# Altium PCB Teensy Crash EDR v3 for Bud PN-1331 PCB Board.PcbDoc
Units mil, origin at the board's own origin, x right, y up, seen from the top; angles counter-clockwise.
Board outline 2700 x 2800 mil, 2 copper layers (Top Layer, Bottom Layer); 30 components, 40 nets, 174 pads, 19 vias.
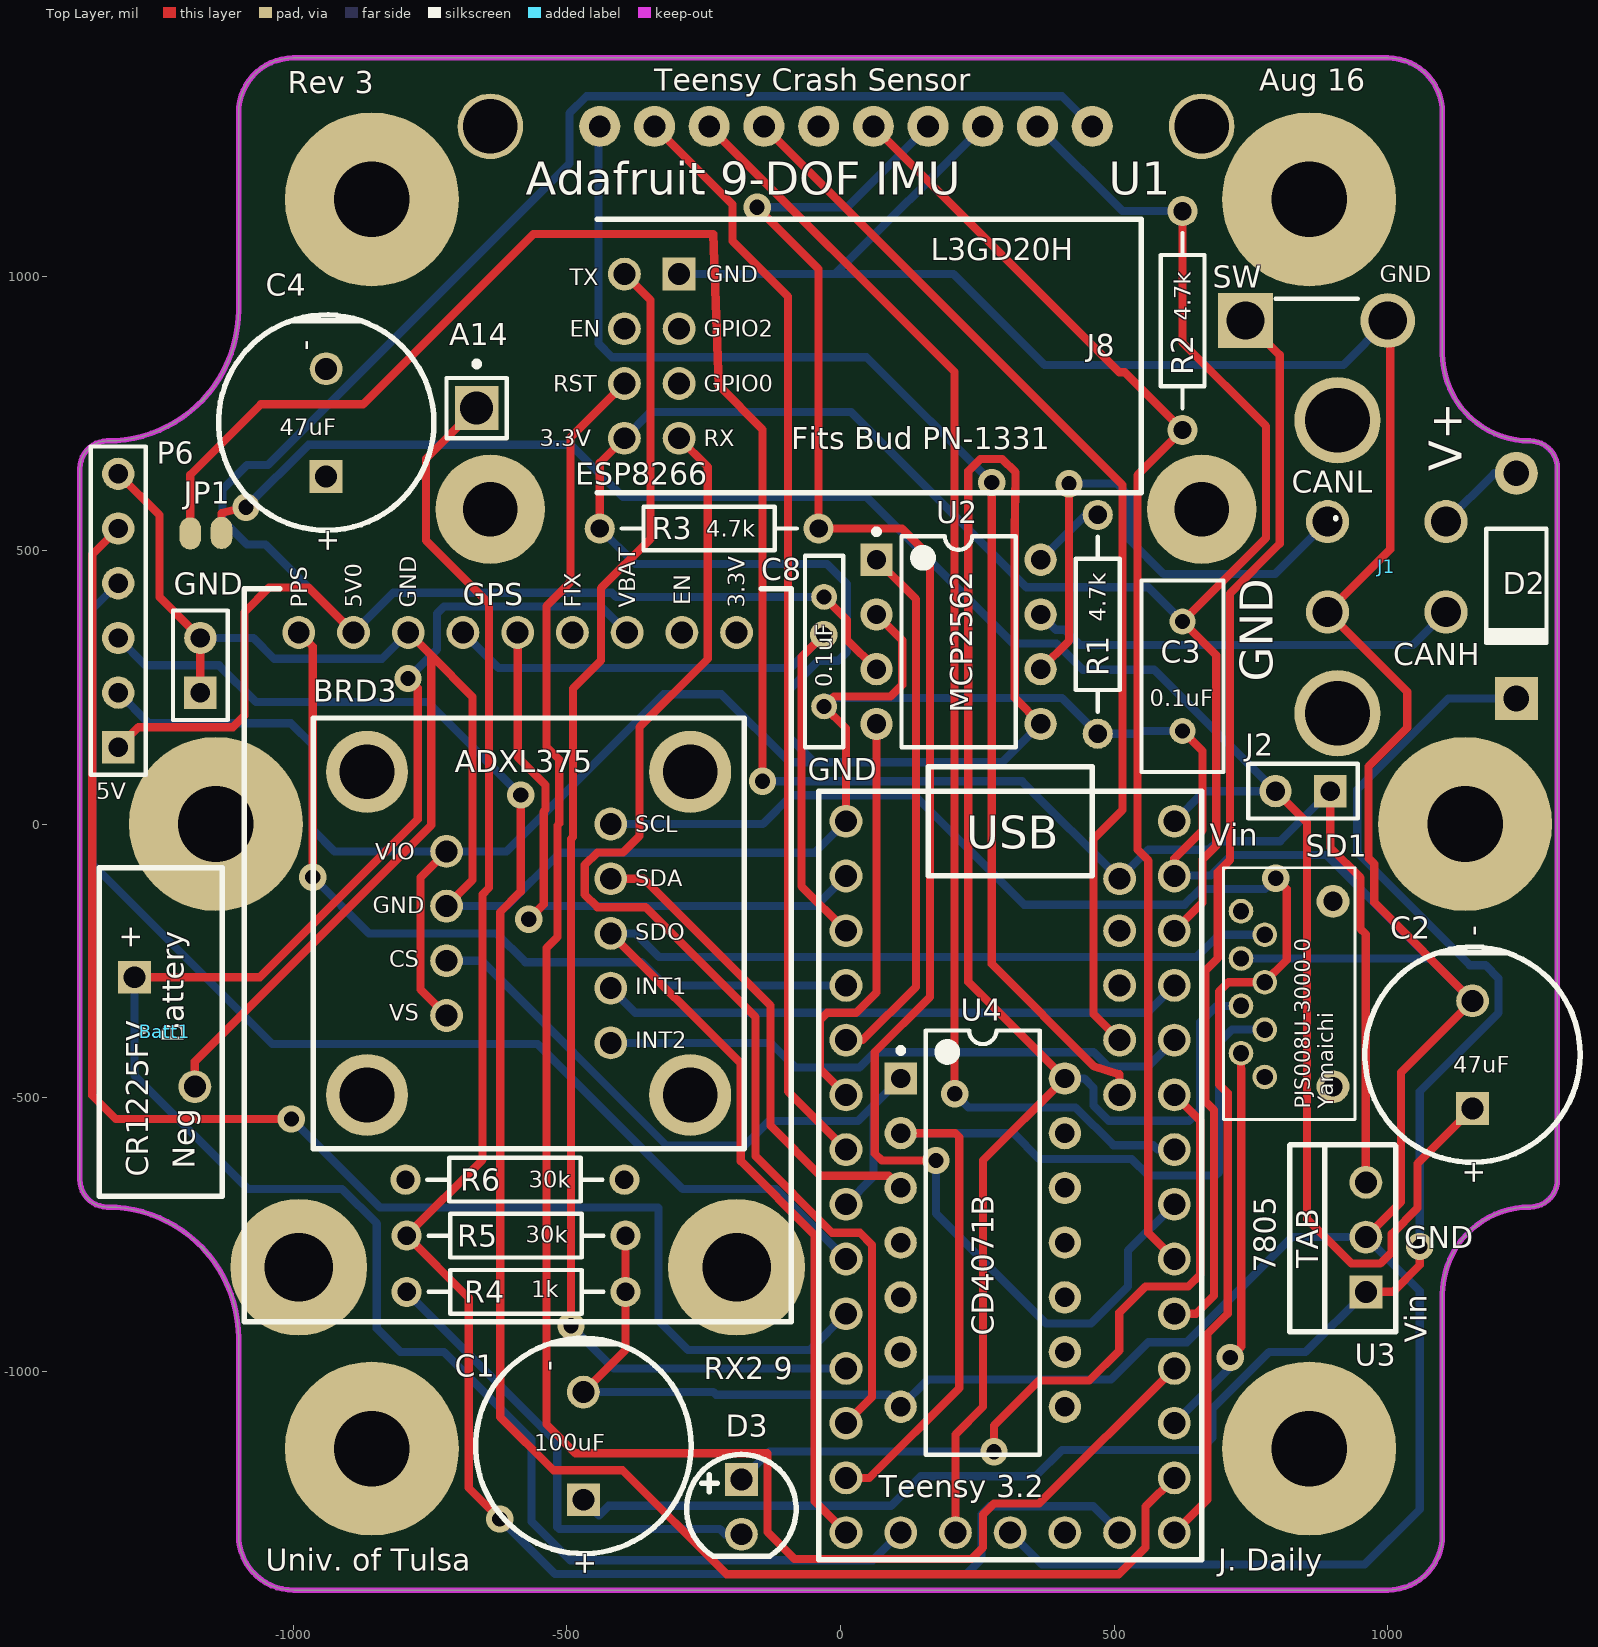
[diagram p0: Top Layer view]
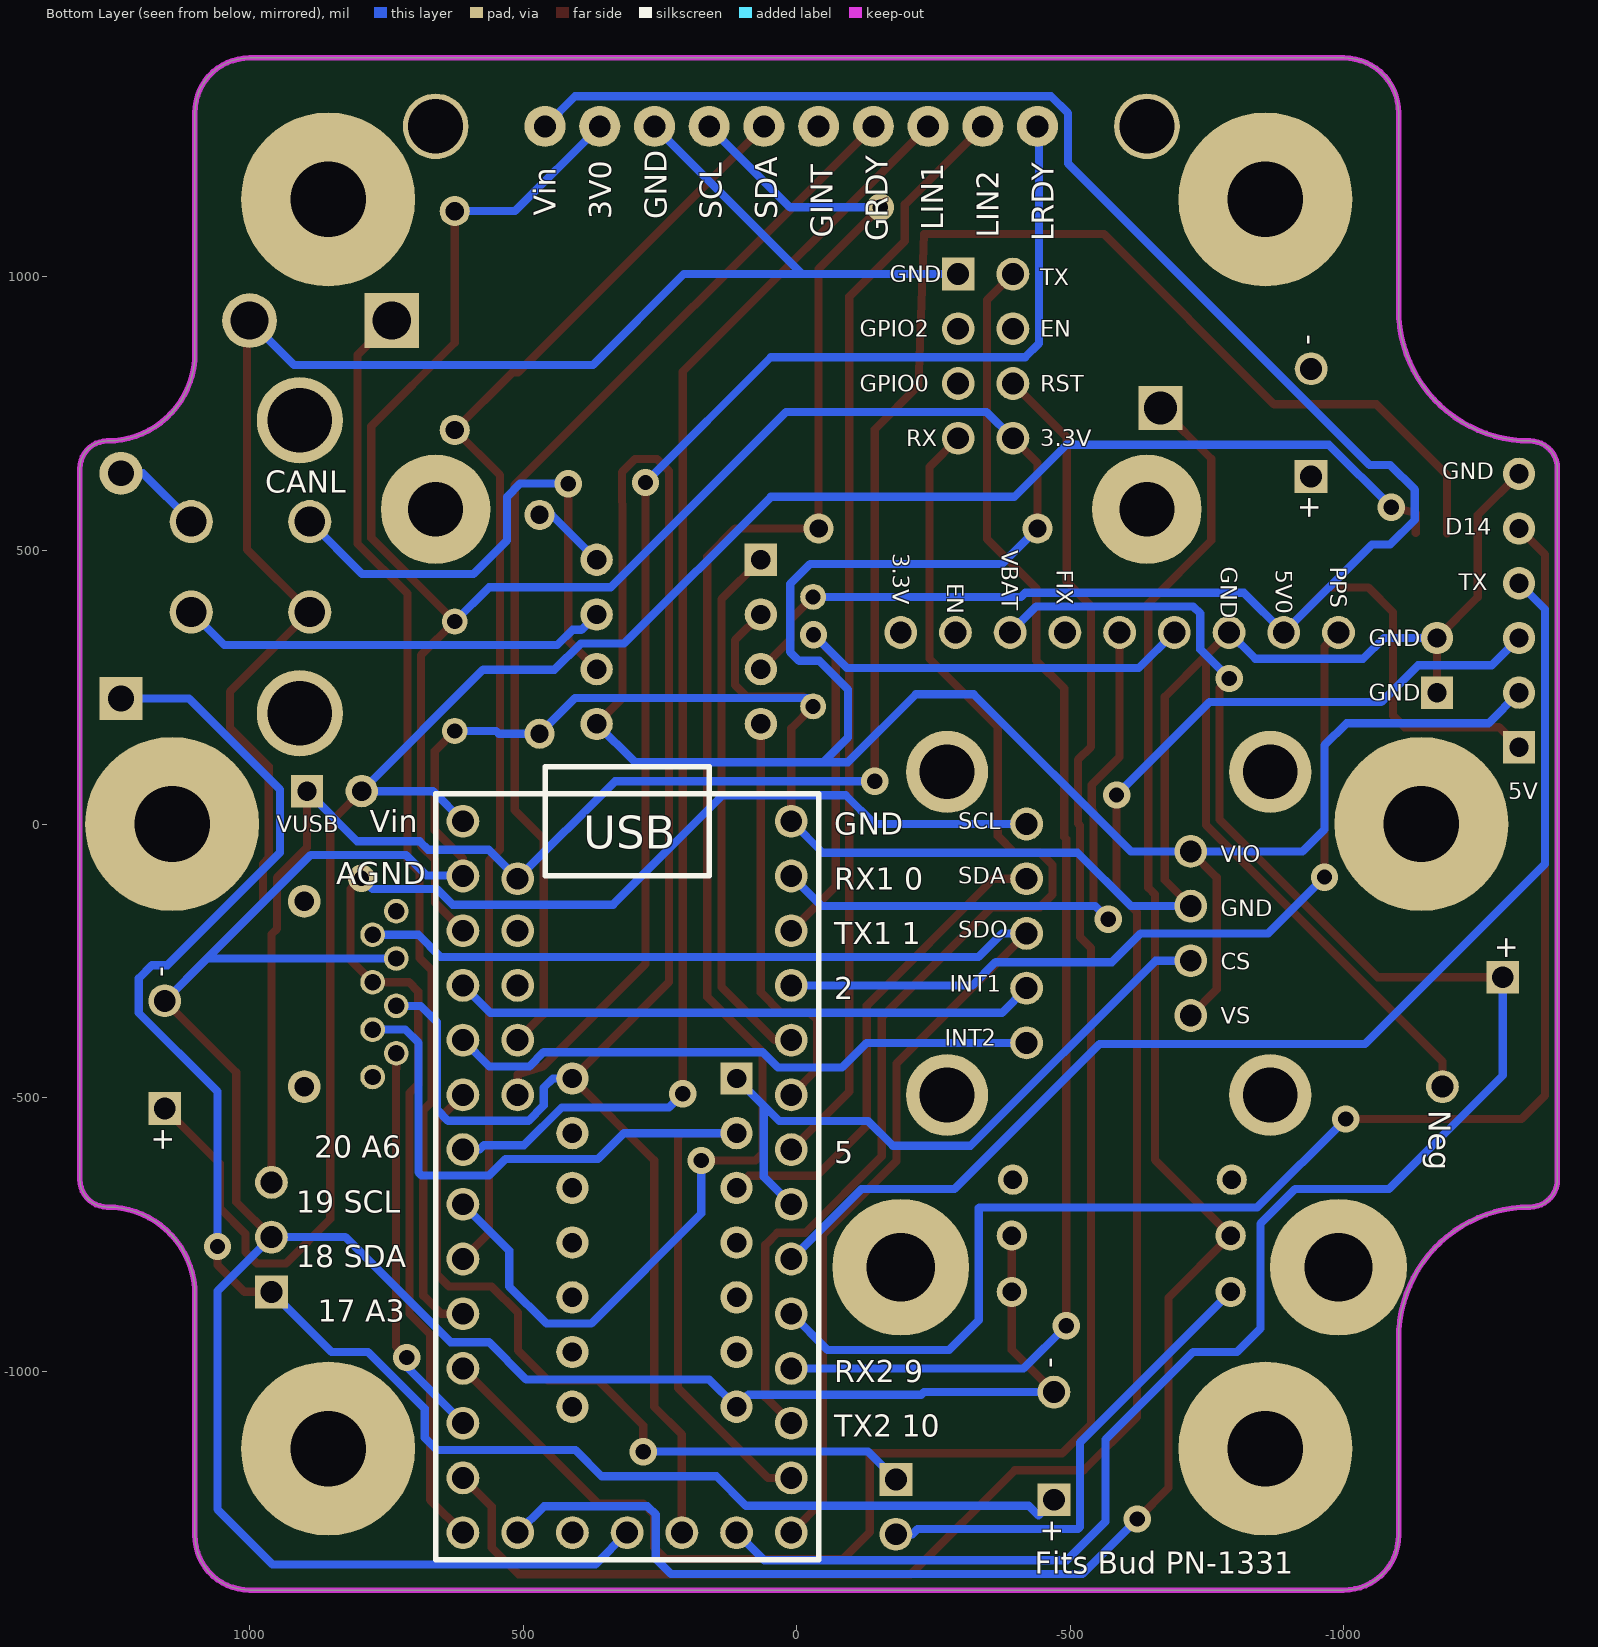
[diagram p1: Bottom Layer view, seen from below]

## Layer stack, top to bottom
Top Solder: solder mask 0.4, Solder Resist, Dk 3.5
Top Layer: signal copper 1.4
Dielectric 1: dielectric 12.6, FR-4, Dk 4.8
Bottom Layer: signal copper 1.4
Bottom Solder: solder mask 0.4, Solder Resist, Dk 3.5

## Board outline
-1340,-700 cw(c-1340,-650) -1390,-650 -1390,650 cw(c-1340,650) -1340,700 ccw(c-1340,940) -1100,940 -1100,1300 cw(c-1000,1300) -1000,1400 1000,1400 cw(c1000,1300) 1100,1300 1100,860 ccw(c1260,860) 1260,700 cw(c1260,650) 1310,650 1310,-650 cw(c1260,-650) 1260,-700 ccw(c1260,-860) 1100,-860 1100,-1300 cw(c1000,-1300) 1000,-1400 -998.89,-1400 -998.89,-1399.99 cw(c-1000,-1300) -1100,-1300 -1100,-940 ccw(c-1340,-940)

## Design rules (kind name [scope] priority, off if disabled: settings)
Clearance [All] p1: gap=10
PolygonConnect [All] p1: connectstyle=Relief reliefconductorwidth=10 reliefentries=4 polygonreliefangle="90 Angle" airgapwidth=10
RoutingVias [All] p1: holewidth=28 width=50 viastyle="Through Hole" minholewidth=28 minwidth=50 maxholewidth=28 maxwidth=50
SolderMaskExpansion [All] p1: expansion=4
Width [All] p1: maxlimit=30 minlimit=10 preferedwidth=15 minimp=50.000000 maximp=50.000000 favimp=50.000000
30 further rules are at their usual default settings.

## Components (designator, comment, footprint, x,y, rotation, side; value= is the part's Value field where it differs from the comment)
A14 "Socket" PIN1 -665,760 r0 top
Batt1 "CR1225FV-LF" "Coin Cell with Tabs" -1180,-480 r90 top
BRD3 "ADXL375" "ADXL375 EVAL" -570,-200 r0 top
C1 "100uF" "Elec. Cap 5 x 10mm" -470,-1235 r90 top
C2 "47uf" "Elec. Cap 5 x 10mm" 1155,-520 r90 top
C3 "0.1uF" RAD-0.2 625,270 r90 top
C4 "47uF" "Elec. Cap 5 x 10mm" -940,635 r90 top
C8 "0.1uF" RAD-0.2 -30,315 r90 top
D2 "STPS2150" DO-41 1235,435 r270 top
D3 "Red" "5mm Rad LED" -180,-1250 r0 top
GND "Header 2" HDR1X2#1 -1170,240 r90 top
GPS "Adafruit Ultimate GPS" GPS -190,430 r90 top
J1 "4 Pos Mini-Fit Jr." "4 POS Vertical MINI-FIT JR" 890,470 r90 top
J2 "Header 2" HDR1X2#1 895,60 r180 top
J8 "ESP8266" ESP8266 -395,1005 r0 top
JP1 "Solder Jumper" "Solder Jumper" -1150,530 r0 top
P6 "Header 6" HDR1X6 -1319.98,140 r90 top
R1 "4.7k" AXIAL-0.4 470,365 r90 top
R2 "4.7k" AXIAL-0.4 625,920 r90 top
R3 "4.7k" AXIAL-0.4 -240,540 r180 top
R4 "1.5k" AXIAL-0.4 -593,-855 r0 top
R5 "30k" AXIAL-0.4 -593,-752.25 r180 top
R6 "30k" AXIAL-0.4 -595,-650 r180 top
SD1 "microSD" "SD- VERTICAL" 900,-480 r90 top
SW "Header 2" HDR1X2#2 875,910 r0 top
"Teensy 3.2" "Teensy 3.2" Teensy 10,-1295 r0 top
U1 "9-DOF IMU BREAKOUT BRD" "Adafruit 9-DOF IMU" 660,1275 r180 top
U2 "MCP2562-E/P" PDIP300-P8 215.67,332.91 r0 top
U3 "OKI-78SR" 78xx 960,-855 r90 top
U4 "74HC32" N14A 260,-765 r0 top

## Footprints (in the part's own frame and the unit in brackets; to place one, negate y for a bottom-side part, rotate by r counter-clockwise, add the part's x,y. Pads: shape width x height; smd on the part's side, far side on the other; paste and mask are expansions set on the pad)
"4 POS Vertical MINI-FIT JR" [mm] "Vertical Header"
  round 4 hole 3: 0(-6.8,-0.46) 0(6.8,-0.46)
  round 2 hole 1.4: 1(2.1,-5.5) 2(-2.1,-5.5) 3(2.1,0) 4(-2.1,0)
"5mm Rad LED" [mil]
  rect 60x60 hole 40: 1(-1.11,52.06)
  round 60 hole 40: 2(-1.11,-47.94)
  silkscreen extent -101,-88 99,98
78xx [mil] "Voltage regulator based on LM7805"
  rect 60x60 hole 40: 1(0,0)
  round 60 hole 40: 2(100,0) 3(200,0)
  silkscreen extent -73,-55 269,139
"Adafruit 9-DOF IMU" [mil] "Adafruit 9-DOF IMU Breakout - L3GD20H + LSM303  PRODUCT ID: 1714"
  round 200 hole 100: 0(0,700) 0(1300,700)
  round 120 hole 100: 0(0,0) 0(1300,0)
  round 75 hole 40: 1(200,0) 2(300,0) 3(400,0) 4(500,0) 5(600,0) 6(700,0) 7(800,0) 8(900,0) 9(1000,0) 10(1100,0)
"ADXL375 EVAL" [mil] "EVAL-ADXL375Z Blard"
  round 150 hole 100: 0(-295.28,-295.28) 0(-295.28,295.28) 0(295.28,-295.28) 0(295.28,295.28)
  round 60 hole 40: 1(-150,-150) 2(-150,-50) 3(-150,50) 4(-150,150) 5(150,-200) 6(150,-100) 7(150,0) 8(150,100) 9(150,200)
  silkscreen extent -394,-394 394,394
AXIAL-0.4 [mm] "Axial Device, Thru-Hole; 2 Leads; 0.4 in Pin Spacing"
  round 1.4 hole 0.85: 1(-5.08,0) 2(5.08,0)
  silkscreen extent -4.06,-1.02 4.06,1.02
"Coin Cell with Tabs" [mil] "Renata Two pins vertical mounting"
  rect 60x60 hole 40: 1(200,110.24)
  round 60 hole 40: 2(0,0)
  silkscreen extent -200,-50 400,175
DO-41 [mm] "Diode, Axial; Body 5.2 x 2.7 mm (LxDia. max), Lead Dia. 0.86 mm (max)"
  round 2 hole 1.2: 1(-5.23,0)
  rect 2x2 hole 1.2: 2(5.23,0)
  silkscreen extent -2.65,-1.4 2.75,1.4
"Elec. Cap 5 x 10mm" [mil] "2 lead polarized Radial Capacitor with 5 mm lead spacing and 10 mm diameter can"
  rect 60x60 hole 40: 1(0,0)
  round 60 hole 40: 2(196.85,0)
  silkscreen extent -98,-197 295,197
ESP8266 [mil] "WiFi Module - ESP8266 Sparkfun"
  rect 60x60 hole 40: 1(100,0)
  round 60 hole 40: 2(0,0) 3(100,-100) 4(0,-100) 5(100,-200) 6(0,-200) 7(100,-300) 8(0,-300)
  silkscreen extent -50,-400 945,100
GPS [mil] "Adafruit Ultimate GPS Breakout"
  round 250 hole 125: 0(-1240,0) 0(-1240,800)
  round 60 hole 40: 1(-80,0) 2(-80,100) 3(-80,200) 4(-80,300) 5(-80,400) 6(-80,500) 7(-80,600) 8(-80,700) 9(-80,800)
  silkscreen extent -1340,-100 0,900
HDR1X2#1 [mm] "Connector; Header; 2 Position"
  rect 1.5x1.5 hole 0.9: 1(0,0)
  round 1.5 hole 0.9: 2(2.54,0)
  silkscreen extent -1.27,-1.27 3.81,1.27
HDR1X2#2 [mm] "Connector; Header; 2 Position"
  rect 2.54x2.54 hole 1.778: 1(-3.429,0.254)
  round 2.54 hole 1.778: 2(3.175,0.254)
  silkscreen extent -2.03,1.27 1.78,1.27
HDR1X6 [mm] "Connector; Header; 6 Position"
  rect 1.5x1.5 hole 0.9: 1(0,0)
  round 1.5 hole 0.9: 2(2.54,0) 3(5.08,0) 4(7.62,0) 5(10.16,0) 6(12.7,0)
  silkscreen extent -1.27,-1.27 13.97,1.27
N14A [mm] "DIP, 14-Leads, Row Spacing 7.62mm, Pitch 2.54mm, Body 19.18x6.35mm"
  rect 1.5x1.5 hole 0.9: 1(-3.81,7.62)
  round 1.5 hole 0.9: 2(-3.81,5.08) 3(-3.81,2.54) 4(-3.81,0) 5(-3.81,-2.54) 6(-3.81,-5.08) 7(-3.81,-7.62) 8(3.81,-7.62) 9(3.81,-5.08) 10(3.81,-2.54) 11(3.81,0) 12(3.81,2.54) 13(3.81,5.08) 14(3.81,7.62)
  silkscreen extent -3.93,-9.85 2.65,9.85, body extent -3.55,-9.85 3.55,9.85, height 5.08
PDIP300-P8 [mm] "DIP, 8-Leads, Row Spacing 7.62mm, Pitch 2.54mm, Body 9.5x6.6mm"
  rect 1.5x1.5 hole 0.9: 1(-3.81,3.81)
  round 1.5 hole 0.9: 2(-3.81,1.27) 3(-3.81,-1.27) 4(-3.81,-3.81) 5(3.81,-3.81) 6(3.81,-1.27) 7(3.81,1.27) 8(3.81,3.81)
  silkscreen extent -3.93,-4.9 2.65,5.23, body extent -3.55,-4.9 3.55,4.9, height 4.32
PIN1 [mil] "Connector; Plug"
  rect 80x80 hole 60: 1(0,0)
  silkscreen extent -55,-55 55,86
RAD-0.2 [mm] "Radial Cap, Thru-Hole; 2 Leads; 0.2 in Pin Spacing"
  round 1.2 hole 0.7: 1(-2.54,0) 2(2.54,0)
  silkscreen extent -4.44,-1.91 4.44,1.91
"SD- VERTICAL" [mil] "MicroSD Card Conn Ver Dip Mnt Manual Yamaichi PJS008U-3000-0"
  round 60 hole 35.43: 0(0,0) 0(338.58,0)
  round 45 hole 30: 1(17.72,124.8) 2(61.02,168.11) 3(104.33,124.8) 4(147.64,168.11) 5(190.94,124.8) 6(234.25,168.11) 7(277.56,124.8) 8(320.87,168.11)
  silkscreen extent -60,-40 400,200
"Solder Jumper" [mm]
  rrect100% 1x1.5 smd: 1(-0.974,0.025) 2(0.475,0.05)
Teensy [mil] "32 bit Arduino Compatible Microcontroller www.pjrc.com/teensy"
  round 60 hole 40: 1(0,0) 2(0,100) 3(0,200) 4(0,300) 5(0,400) 6(0,500) 7(0,600) 8(0,700) 9(0,800) 10(0,900) 11(0,1000) 12(0,1100) 13(0,1200) 14(0,1300) 15(100,0) 16(200,0) 17(300,0) 18(400,0) 19(500,0) 20(600,0) 21(600,100) 22(600,200) 23(600,300) 24(600,400) 25(600,500) 26(600,600) 27(600,700) 28(600,800) 29(600,900) 30(600,1000) 31(600,1100) 32(600,1200) 33(600,1300) 34(500,1195) 35(500,1000) 36(500,900) 37(500,800)
  silkscreen extent -50,-50 650,1400

## Part data
Batt1: library part "CR2032 Battery Holder", "Coin Cell Battery 3V 2-PIN VERT 48mAh 12.5 x 2.5mm"
BRD3: library part "ADXL375 Eval", "Analog Devices  EVAL-ADXL375Z"
C1 C2 C4: library part "Electrolytic Cap", "CAP ALUM 100UF 20% 63V RADIAL"
C3 C8: library part Cap, "Multilayer Ceramic Capacitors MLCC - Leaded 50volts 0.1uF 10% X7R"
D2: library part "Diode 1N4003", "Schottky Diodes & Rectifiers 2.0 Amp 150 Volt"
D3: library part "LED - SMD", "LED RED DIFFUSED 0805 SMD"
GND J2 SW: "Header, 2-Pin"
GPS: library part "GPS - Adafruit"
J1: library part "4 Pos Header Vert", "CONN HEADER 4POS 4.2MM VERT TIN"
J8: "Sparkfun ESP8266 Module (WRL-13678)"
P6: "Header, 6-Pin"
R1 R2 R3 R4 R5 R6: library part Res2, "RES 4.7K OHM 1/4W 5% CARBON FILM"
SD1: library part "SD Card Holder Vertical", "Memory Card Connectors MicroSD Card Conn Ver Dip Mnt Manual"
"Teensy 3.2": library part Teensy, "32 Bit Arduino-Compatible Microcontroller"
U1: library part "Adafruit 9-DOF IMU", "Adafruit 9-DOF IMU Breakout - L3GD20H + LSM303 PRODUCT ID: 1714"
U2: library part MCP2551-E/P, "High-Speed CAN Transceiver, 8-Pin PDIP, Extended Temperature"
U3: library part 7805, "5V DC/DC Converter (7805 replacement)"
U4: library part 74ACT32PC, "Quad 2-Input OR Gate, 14-Pin PDIP, Commercial Grade"

## Free pads (board coordinates)
  round 318 hole 138: 0(-1141.5,0) 0(-856.5,-1141.5) 0(-856.5,1141.5) 0(856.5,-1141.5) 0(856.5,1141.5) 0(1141.5,0)
  round 60 hole 40: 2(510,-195)

## Via types
v1: diameter 50, hole 28, Top Layer to Bottom Layer, 19 vias

## Nets (pads, with @x,y where several pads share a name; then routed paths per layer and width w, separated by ;. In a path a pad name is that pad's centre, name@x,y a point inside that pad or via, vN(x,y) a via of type N, cw(c..) or ccw(c..) an arc to the next point about the centre after c; other vN are vias at no path point)
3V3: "Teensy 3.2.16" "Teensy 3.2.31" BRD3.1 BRD3.4 C3.2 J8.8 P6.2 R2.2 R3.2 SD1.4 U1.2 U2.5 U4.14 | length 9782.4
  Top Layer w15: BRD3.1 -767.5,-302.5 -767.5,-97.5 BRD3.4 ; R3.2 -440,660 J8.8 ; 210,-1295 210,-1115.5 260.5,-1065 260.5,-614.5 U4.14 233.5,-288.5 233.5,645 255.5,667 295.5,667 319.5,643 318.5,530 318.5,230.08 U2.5 ; 610,-195 661.27,-143.73 661.27,-65.04 686.5,-39.81 686.5,308.5 C3.2 777.5,522.5 777.5,727 625,879.5 R2.2
  Bottom Layer w15: P6.2 -1263.98,184 -1004.5,184 -964.5,144 -964.5,-10 -924.5,-50 BRD3.4 -610.5,-50 -323.5,237 -217.5,237 -93.5,113 -48.5,113 ; R3.2 -375,475 -24.5,475 12,438.5 12,314.71 -4.5,298.21 -41.29,298.21 -93.5,246 -93.5,158 -48.5,113 ; J8.8 -347,753 19.5,753 340,432.5 562.5,432.5 C3.2 ; U1.2 515,1120 R2.2 ; U2.5 295.76,113 -48.5,113 ; U4.14 445.5,-465 462.5,-482 462.5,-514.68 490.32,-542.5 637,-542.5 657.5,-522 657.5,-362 687.14,-332.36 SD1.4
5V0: C8.2 GPS.8 P6.1 U1.1 U2.3 | length 4104.3
  Top Layer w15: P6.1 -1282.98,177 -1110.5,177 -1089.5,198 -1089.5,387 -1044.5,432 -972,432 GPS.8 ; C8.2 12,373 12,336.58 U2.3
  Bottom Layer w15: C8.2 -410,415 -417.5,422.5 -817.5,422.5 GPS.8 -1051,511 -1084.5,511 -1129.5,556 -1129.5,611 -1084.5,656 -1046.5,656 -495.5,1207 -495.5,1299 -464.5,1330 405,1330 U1.1
12V0: C1.1 D2.2 U3.1 | length 3172.6
  Top Layer w15: U3.1 1009.5,-855 1058.5,-806 v1(1058.5,-772)
  Bottom Layer w15: C1.1 -441.53,-1263.47 -424.06,-1246 92.5,-1246 146.5,-1192 356.5,-1192 404.5,-1144 657.5,-1144 680,-1121.5 680,-1068.39 783.39,-965 850,-965 U3.1 ; v1(1058.5,-772) 1058.5,-489 1202.5,-345 1202.5,-282 1178.5,-258 1149.89,-258 944.28,-52.39 944.28,62.78 1110.59,229.09 D2.2
CAN1H: J1.2 U2.7 | length 789
  Bottom Layer w15: U2.7 393.64,354.94 409.76,354.94 437.7,327 1046.21,327 J1.2
CAN1L: J1.3 U2.6 | length 987.9
  Top Layer w15: U2.6 417.5,334.74 v1(417.5,622)
  Bottom Layer w15: v1(417.5,622) 505.5,622 529.5,598 529.5,518 590.5,457 794.32,457 J1.3
CANRX: "Teensy 3.2.9" U2.4 | length 771.4
  Top Layer w15: 10,-495 -37.5,-447.5 -37.5,-358 -24.5,-345 28.5,-345 65.67,-307.83 U2.4
CANTX: "Teensy 3.2.10" U2.1 | length 978.5
  Top Layer w15: 10,-395 40.5,-395 137.7,-297.8 137.7,410.89 U2.1
GND: "Teensy 3.2.14" "Teensy 3.2.17" "Teensy 3.2.32" Batt1.2 BRD3.3 C1.2 C2.2 C3.1 C8.1 GND.1 GND.2 GPS.7 J1.4 J8.1 P6.6 R1.1 R4.2 R5.1 SD1.6 SW.2 U1.3 U2.2 U3.2 U4.7 | length 12753.6
  Top Layer w15: P6.6 -1244.51,564.53 -1244.51,414.51 GND.2 GND.1 ; Batt1.2 -1180,-434.22 -747.78,-2 -747.78,307.78 ; GPS.7 -747.78,307.78 ; BRD3.3 -672.5,-102.5 -672.5,232.5 -747.78,307.78 ; C1.2 -393,-961.15 R4.2 R5.1 ; 10,5 10,175 C8.1 -12,233 91.5,233 112.7,254.2 112.7,335.89 U2.2 ; 610,-95 610,-62.99 661.5,-11.49 661.5,133.5 C3.1 ; U3.2 1024.34,-690.66 1024.34,-453.81 C2.2 975.5,-143.65 975.5,-73 965,-62.5 965,105.32 1035.5,175.82 1035.5,241.82 J1.4 1004.5,501.82 1004.5,878 1000,878 SW.2
  Bottom Layer w15: GND.2 -1072.97,340 -1034.97,302 -838,302 GPS.7 ; BRD3.3 -610.52,-150 -513.02,-52.5 -47.5,-52.5 10,5 ; C1.2 -232.5,-1038.15 -227.65,-1043 88,-1043 U4.7 160,-1015 494.5,-1015 562.5,-947 633,-947 825,-755 U3.2 1058.5,-853.5 1058.5,-1252.36 957.86,-1353 368,-1353 310,-1295 ; J8.1 -10,1005 ; C8.1 -30,230 405,230 R1.1 544.5,165 549.5,170 C3.1 ; U1.3 -10,1005 ; 610,-95 610,-94 676.63,-94 714.13,-56.5 888.35,-56.5 1077.6,-245.75 ; SD1.6 1077.6,-245.75 ; SW.2 919,839 372.5,839 206.5,1005 -10,1005 ; C2.2 1077.6,-245.75
NetA14_1: "Teensy 3.2.19" A14.1 R5.2 | length 3541.5
  Top Layer w15: A14.1 -757.5,667.5 -757.5,518 -642.5,403 -642.5,-116.5 -654.5,-128.5 -654.5,-613.75 R5.2 -679.5,-865.75 -679.5,-1213 v1(-622.5,-1270)
  Bottom Layer w15: v1(-622.5,-1270) -522.06,-1370.44 230.06,-1370.44 257.5,-1343 257.5,-1262 272.5,-1247 462,-1247 510,-1295
NetBatt1_1: "Teensy 3.2.15" Batt1.1 GPS.3 | length 3582.5
  Top Layer w15: Batt1.1 -1061.13,-280 -772.78,8.36 -772.78,248.28 v1(-790.5,266)
  Bottom Layer w15: Batt1.1 -1290.24,-459.26 -1082.5,-667 -910.86,-667 -847.5,-730.36 -847.5,-922 -804.5,-965 -724.5,-965 -564.5,-1125 -564.5,-1275 -494.06,-1345.44 59.56,-1345.44 110,-1295 ; v1(-790.5,266) -737.5,319 -737.5,384.5 -724.5,397.5 -437.5,397.5 GPS.3
NetBRD3_2: "Teensy 3.2.7" BRD3.2 U4.1 | length 1222.4
  Bottom Layer w15: BRD3.2 -655.54,-250 -317.54,-588 -175.5,-588 -130.5,-543 32,-543 60.5,-514.5 ; 10,-695 60.5,-644.5 60.5,-514.5 ; U4.1 60.5,-514.5
NetBRD3_5: "Teensy 3.2.29" BRD3.5 | length 1090.9
  Bottom Layer w15: BRD3.5 -127.5,-400 -82.5,-445 34.5,-445 62.5,-417 462.5,-417 488.5,-443 562,-443 610,-395
NetBRD3_6: "Teensy 3.2.30" BRD3.6 | length 1069.4
  Bottom Layer w15: BRD3.6 -375,-345 560,-345 610,-295
NetBRD3_7: "Teensy 3.2.1" BRD3.7 SD1.7 | length 2502.9
  Top Layer w15: BRD3.7 -182.22,-437.78 -182.22,-616.25 -47.5,-750.97 -47.5,-1237.5 10,-1295
  Bottom Layer w15: BRD3.7 -375,-200 -332,-243 650.94,-243 691.5,-202.44 SD1.7
NetBRD3_8: BRD3.8 U4.3 | length 892.6
  Top Layer w15: BRD3.8 -360.01,-100 -128.1,-331.91 -128.1,-551.36 -36.46,-643 88,-643 U4.3
NetBRD3_9: "Teensy 3.2.20" BRD3.9 SD1.5 | length 2681.4
  Top Layer w15: 610,-1295 670,-1235 670,-932.5 707.5,-895 707.5,-491.86 691.89,-476.25 691.89,-305.97 708.81,-289.06 SD1.5 815.5,-248.75 815.5,-119 v1(795.5,-99)
  Bottom Layer w15: BRD3.9 -142,0 -89.5,52.5 135.5,52.5 335.5,-147.5 629,-147.5 657.5,-119 775.5,-119 v1(795.5,-99)
NetD3_1: "Teensy 3.2.28" D3.1 | length 1410.1
  Top Layer w15: v1(280.5,-1147) 280.5,-1099 362.5,-1017 454.5,-1017 509.5,-962 509.5,-893 557.5,-845 635.5,-845 657.5,-823 657.5,-542.5 610,-495
  Bottom Layer w15: D3.1 -130.17,-1147 v1(280.5,-1147)
NetD3_2: D3.2 R4.1 | length 885.8
  Bottom Layer w15: R4.1 -517.81,-1130.19 -517.81,-1284.63 -513.97,-1288.47 -220.63,-1288.47 -211.16,-1297.94 D3.2
NetGPS_5: "Teensy 3.2.13" GPS.5 | length 1170
  Top Layer w15: GPS.5 -590,122.5 -539,71.5 -539,26 -542.5,22.5 -542.5,-147 v1(-569.5,-174)
  Bottom Layer w15: v1(-569.5,-174) -545.5,-150 -45,-150 10,-95
NetGPS_6: "Teensy 3.2.12" GPS.6 | length 1303.1
  Top Layer w15: v1(-30.5,346) -71.12,305.38 -71.12,-113.88 10,-195
  Bottom Layer w15: GPS.6 -625,285 -91.5,285 v1(-30.5,346)
NetGPS_9: "Teensy 3.2.11" GPS.9 | length 1514.1
  Top Layer w15: GPS.9 -964.5,324.5 v1(-964.5,-97)
  Bottom Layer w15: v1(-964.5,-97) -861.5,-200 -628.5,-200 -576,-252.5 -363.5,-252.5 -321,-295 10,-295
NetJ8_2: "Teensy 3.2.4" J8.2 | length 2536.5
  Top Layer w15: v1(-492.5,-917) -492.5,-27.5 -489,-24 -489,247.5 -437.5,299 -437.5,431 -347.5,521 -347.5,957.5 J8.2
  Bottom Layer w15: v1(-492.5,-917) -414.5,-995 10,-995
NetJ8_6: "Teensy 3.2.23" J8.6 | length 3493.5
  Top Layer w15: J8.6 -493.5,706.5 -493.5,442 -537.5,398 -537.5,141 -514,117.5 -514,1 -517.5,-2.5 -517.5,-206.5 -537.5,-226.5 -537.5,-1097 -484.5,-1150 -133.5,-1150 -133.5,-1294 -84.5,-1343 239.5,-1343 260.5,-1322 260.5,-1262 280.5,-1242 363,-1242 610,-995
NetJ8_7: "Teensy 3.2.3" J8.7 | length 2261
  Top Layer w15: J8.7 -242.5,652.5 -242.5,302 -367.5,177 -367.5,-22 -397.5,-52 -444.5,-52 -467.5,-75 -467.5,-129 -444.5,-152 -356.5,-152 -155.5,-353 -155.5,-607 -15.5,-747 35.5,-747 57.5,-769 57.5,-1047.5 10,-1095
NetP6_3: "Teensy 3.2.21" P6.3 | length 3474
  Top Layer w15: v1(-584.5,53) -584.5,-123.74 -622,-161.24 -622,-1083.5 -524.5,-1181 -398.5,-1181 -208.5,-1371 508.5,-1371 557.5,-1322 557.5,-1247.5 610,-1195
  Bottom Layer w15: P6.3 -1269.98,290 -1135.5,290 -1068.32,222.82 -754.32,222.82 v1(-584.5,53)
NetP6_4: "Teensy 3.2.6" P6.4 | length 2209.2
  Bottom Layer w15: P6.4 -1367.5,392.48 -1367.5,-73 -1038.5,-402 -553.44,-402 -288.44,-667 -118,-667 10,-795
NetP6_5: "Teensy 3.2.5" P6.5 | length 2773.2
  Top Layer w15: P6.5 -1367.5,492.48 -1367.5,-496 -1324.5,-539 v1(-1003.5,-539)
  Bottom Layer w15: v1(-1003.5,-539) -841.5,-701 -333.5,-701 -332.5,-702 -332.5,-907 -278.5,-961 -56,-961 10,-895
NetR1_2: R1.2 U2.8 | length 138.3
  Bottom Layer w15: U2.8 447.76,565 R1.2
NetR2_1: "Teensy 3.2.25" R2.1 U1.5 | length 2372
  Top Layer w15: U1.5 509.5,825.5 519.5,825.5 R2.1 542.5,637.5 542.5,-47 562.5,-67 562.5,-747.5 610,-795
NetR3_1: "Teensy 3.2.26" R3.1 U1.4 | length 3226.7
  Top Layer w15: v1(-152.5,1127) -40,1014.5 R3.1 112.5,540 163.5,489 163.5,-316 62.5,-417 62.5,-602 75.5,-615 v1(174.5,-615)
  Bottom Layer w15: v1(-152.5,1127) 12,1127 U1.4 ; v1(174.5,-615) 174.5,-712 375.5,-913 457.5,-913 525.5,-845 525.5,-779.5 610,-695
NetSD1_2: "Teensy 3.2.22" SD1.2 | length 727
  Top Layer w15: v1(712.5,-975) 732.5,-955 732.5,-448 731.89,-447.39 SD1.2
  Bottom Layer w15: 610,-1095 712.5,-992.5 v1(712.5,-975)
NetSD1_3: "Teensy 3.2.2" SD1.3 U4.2 | length 1789.9
  Top Layer w15: 10,-1195 52.53,-1195 217.03,-1030.5 217.03,-572.5 209.53,-565 U4.2
  Bottom Layer w15: U4.2 315.94,-565 362.97,-612.03 532.03,-612.03 562.5,-642.5 685.53,-642.5 691.5,-636.53 691.5,-399.67 715.5,-375.67 SD1.3
NetSW_1: "Teensy 3.2.24" SW.1 | length 1956.7
  Top Layer w15: 610,-895 649.5,-895 682.5,-862 682.5,-522.5 666.89,-506.89 666.89,-267.36 689.54,-244.71 689.54,-87.49 711.5,-65.52 711.5,421.14 802.5,512.14 802.5,857.5 SW.1
"NetTeensy 3.2_8": "Teensy 3.2.8" U1.9 | length 2015
  Top Layer w15: U1.9 -197.5,1132.5 -197.5,1065.27 -96.12,963.89 -96.12,-488.88 10,-595
"NetTeensy 3.2_27": "Teensy 3.2.27" U1.8 | length 2397.5
  Top Layer w15: U1.8 208.5,826.5 v1(208.5,-493)
  Bottom Layer w15: v1(208.5,-493) 233.47,-517.97 429.48,-517.97 498.51,-587 571.5,-587 579.5,-595 610,-595
"NetTeensy 3.2_36": "Teensy 3.2.36" U1.7 | length 1983.1
  Top Layer w15: U1.7 515.5,619.5 515.5,25.5 462.5,-27.5 462.5,-347.5 510,-395
"NetTeensy 3.2_37": "Teensy 3.2.37" U1.10 | length 2452.9
  Top Layer w15: v1(276.5,624) 276.5,-256 463.5,-443 510,-457.5 510,-495
  Bottom Layer w15: U1.10 -442.5,1272.5 -442.5,878 -417.5,853 47.5,853 v1(276.5,624)
RAW: D2.1 J1.1 | length 165
  Bottom Layer w15: J1.1 1194.76,640.91 D2.1
VIN: "Teensy 3.2.33" C2.1 J2.2 JP1.2 | length 3807
  Top Layer w15: JP1.2 -1131.3,568 v1(-1086.5,579) ; J2.2 852.5,2.5 852.5,-722 933.5,-803 986.5,-803 1007.5,-782 1007.5,-749 1054.5,-702 1054.5,-620.5 C2.1
  Bottom Layer w15: v1(-1086.5,579) -972.5,693 -492.5,693 -397.5,598 47.44,598 315.5,329.94 394.56,329.94 442.5,282 573,282 J2.2 665,60 610,5
VUSB: "Teensy 3.2.34" J2.1 JP1.1 U3.3 | length 4198
  Top Layer w15: JP1.1 -1188.35,638.15 -1059.5,767 -872.5,767 -561.5,1078 -232.5,1078 -222.5,801 -142.5,721 v1(-142.5,78) ; J2.1 895,-43.08 950.03,-98.11 950.03,-191.53 960,-201.5 U3.3
  Bottom Layer w15: v1(-142.5,78) 332,78 510,-100 563,-47 673.63,-47 689.13,-31.5 803.5,-31.5 J2.1
pads on no net: "Teensy 3.2.18" "Teensy 3.2.35" BRD3.0 C4.1 C4.2 GPS.0 GPS.1 GPS.2 GPS.4 J1.0 J8.3 J8.4 J8.5 R6.1 R6.2 SD1.0 SD1.1 SD1.8 U1.0 U1.6 U4.4 U4.5 U4.6 U4.8 U4.9 U4.10 U4.11 U4.12 U4.13

## Keep-outs
Keep-Out Layer:
  the board outline again, w10

## Silkscreen, mask and mechanical layers (free items; w line width, h text height)
Top Overlay:
  lines w10: 905,557.68 905,560
  text "Teensy Crash Sensor" at -340,1340 h40
  text "Aug 16" at 765,1340 h40
  text "Rev 3" at -1010,1335 h40
  text "L3GD20H" at 165,1030.01 h40
  text "GND" at 985,990.01 h30
  text "4.7k" at 640,920 h30 r90
  text "47uF" at -1025,710 h30
  text "Fits Bud PN-1331" at -90,685 h40
  text "CANL" at 825,605 h40
  text "4.7k" at -245,525 h30
  text "4.7k" at 485,370 h30 r90
  text "0.1uF" at -15,250 h30 r90
  text "0.1uF" at 565,215 h30
  text "MCP2562" at 240.67,202.91 h40 r90
  text "5V" at -1360,45 h30
  text "47uF" at 1120,-455 h30
  text "CR1225FV" at -1265,-645 h40 r90
  text "30k" at -570,-665 h30
  text "30k" at -575,-765 h30
  text "7805" at 795,-820 h40 r90
  text "1k" at -565,-865 h30
  text "CD4071B" at 280,-935 h40 r90
  text "100uF" at -560,-1145 h30
  text "Univ. of Tulsa" at -1050,-1365 h40
  text "J. Daily" at 690,-1365 h40
Bottom Overlay:
  text "GND" at -1180.01,630.01 h30
  text "CANL" at 971.62,605 h40
  text "D14" at -1185.01,528.76 h30
  text "TX" at -1210,427.5 h30
  text "GND" at -1045,325 h30
  text "GND" at -1045,225 h30
  text "5V" at -1300,45 h30
  text "VUSB" at 950,-15 h30
  text "Fits Bud PN-1331" at -435,-1370 h40

## Dimensions
-1100,940 to 1100,860 on Mechanical 1
1000,-1400 to 1000,1400 on Mechanical 1
1310,-650 to -1390,-650 on Mechanical 1

## Text inside footprints (layer, text, board x,y; h text height)
Batt1: Top Overlay "Battery" at -1200,-400 h40 r90; Top Overlay "+" at -1280,-230 h40 r90; Top Overlay "Neg" at -1180,-630 h40 r90; Bottom Overlay "+" at -1280,-203.34 h40 r90; Bottom Overlay "Neg" at -1155,-523.37 h40 r90
BRD3: Top Overlay "VS" at -825.01,-360 h30; Top Overlay "CS" at -825.01,-261.67 h30; Top Overlay "GND" at -855,-163.33 h30; Top Overlay "VIO" at -850,-65 h30; Top Overlay "SCL" at -375,-15 h30; Top Overlay "SDA" at -375,-113.75 h30; Top Overlay "SDO" at -375,-212.5 h30; Top Overlay "INT1" at -375,-311.25 h30; Top Overlay "INT2" at -375,-410 h30; Bottom Overlay "CS" at -775.03,-266.67 h30; Bottom Overlay "VS" at -775.03,-365 h30; Bottom Overlay "VIO" at -775.03,-70 h30; Bottom Overlay "GND" at -775.03,-168.33 h30; Bottom Overlay "SCL" at -295.03,-10 h30; Bottom Overlay "SDA" at -295.03,-108.75 h30; Bottom Overlay "SDO" at -295.03,-207.5 h30; Bottom Overlay "INT1" at -280.03,-306.25 h30; Bottom Overlay "INT2" at -270.03,-405 h30
C1: Top Overlay "+" at -450,-1375 h40 r90; Top Overlay "-" at -515,-1000 h40 r90; Bottom Overlay "-" at -450,-995 h40 r90; Bottom Overlay "+" at -450,-1315 h40 r90
C2: Top Overlay "+" at 1175,-660 h40 r90; Top Overlay "-" at 1175,-205 h40 r90; Bottom Overlay "-" at 1175,-280 h40 r90; Bottom Overlay "+" at 1175,-600 h40 r90
C4: Top Overlay "+" at -920,495 h40 r90; Top Overlay "-" at -960,865 h40 r90; Bottom Overlay "-" at -920,875 h40 r90; Bottom Overlay "+" at -920,555 h40 r90
GPS: Top Overlay "PPS" at -975,395 h30 r90; Top Overlay "5V0" at -875,395 h30 r90; Top Overlay "GND" at -775,395 h30 r90; Top Overlay "FIX" at -475,395 h30 r90; Top Overlay "VBAT" at -375,395 h30 r90; Top Overlay "EN" at -275,400 h30 r90; Top Overlay "3.3V" at -175,395 h30 r90; Bottom Overlay "VBAT" at -375,499.96 h30 r90; Bottom Overlay "FIX" at -475,464.98 h30 r90; Bottom Overlay "GND" at -775,469.97 h30 r90; Bottom Overlay "5V0" at -875,464.98 h30 r90; Bottom Overlay "3.3V" at -175,494.97 h30 r90; Bottom Overlay "EN" at -275,439.98 h30 r90; Bottom Overlay "PPS" at -975,469.97 h30 r90
J1: Top Overlay "CANH" at 1010,290 h40; Top Overlay "GND" at 790,260 h60 r90; Top Overlay "V+" at 1135,645 h60 r90
J8: Top Overlay "GND" at -245,990 h30; Top Overlay "GPIO2" at -250,890 h30; Top Overlay "GPIO0" at -250,790 h30; Top Overlay "RX" at -250,690 h30; Top Overlay "3.3V" at -550,690 h30; Top Overlay "RST" at -525.01,790 h30; Top Overlay "EN" at -495.02,890 h30; Top Overlay "TX" at -495.02,985 h30; Bottom Overlay "GPIO2" at -115.04,890 h30; Bottom Overlay "GPIO0" at -115.04,790 h30; Bottom Overlay "GND" at -170.03,990 h30; Bottom Overlay "RX" at -200.02,690 h30; Bottom Overlay "TX" at -445.03,985 h30; Bottom Overlay "EN" at -445.03,890 h30; Bottom Overlay "RST" at -445.03,790 h30; Bottom Overlay "3.3V" at -445.03,690 h30
SD1: Top Overlay "PJS008U-3000-0 / Yamaichi" at 900,-520 h28 r90
"Teensy 3.2": Top Overlay "USB" at 230,-45 h60; Top Overlay "GND" at -60,80 h40; Top Overlay "RX2 9" at -250,-1015 h40; Top Overlay "Vin" at 675,-40 h40; Bottom Overlay "17 A3" at 874.94,-910 h40; Bottom Overlay "AGND" at 841.62,-110 h40; Bottom Overlay "Vin" at 780,-15 h40; Bottom Overlay "19 SCL" at 914.93,-710 h40; Bottom Overlay "18 SDA" at 914.93,-810 h40; Bottom Overlay "20 A6" at 881.61,-610 h40; Bottom Overlay "5" at -68.39,-620 h40; Bottom Overlay "2" at -68.39,-320 h40; Bottom Overlay "TX2 10" at -68.39,-1120 h40; Bottom Overlay "RX2 9" at -68.39,-1020 h40; Bottom Overlay "TX1 1" at -68.39,-220 h40; Bottom Overlay "RX1 0" at -68.39,-120 h40; Bottom Overlay "GND" at -68.39,-20 h40; Bottom Overlay "USB" at 390,-45 h60
U1: Top Overlay "Adafruit 9-DOF IMU" at -575,1150 h60; Bottom Overlay "LIN1" at -267.76,1084.99 h40 r270; Bottom Overlay "LRDY" at -469.99,1065 h40 r270; Bottom Overlay "GINT" at -65.54,1071.66 h40 r270; Bottom Overlay "GRDY" at -166.65,1065 h40 r270; Bottom Overlay "GND" at 237.79,1104.99 h40 r270; Bottom Overlay "SCL" at 136.68,1104.99 h40 r270; Bottom Overlay "LIN2" at -368.88,1071.66 h40 r270; Bottom Overlay "SDA" at 35.57,1104.99 h40 r270; Bottom Overlay "3V0" at 338.9,1104.99 h40 r270; Bottom Overlay "Vin" at 440.01,1111.65 h40 r270
U3: Top Overlay "Vin" at 1071,-948 h40 r90; Top Overlay "TAB" at 873,-812 h40 r90; Top Overlay "GND" at 1030,-775 h40